# Altium PCB stencil.PcbDoc (part 1 of 2)
Units mil, origin at the board's own origin, x right, y up, seen from the top; angles counter-clockwise.
Board outline 6000 x 6360 mil, 2 copper layers (Top Layer, Bottom Layer); 167 components, 0 nets, 527 pads, 94 vias.
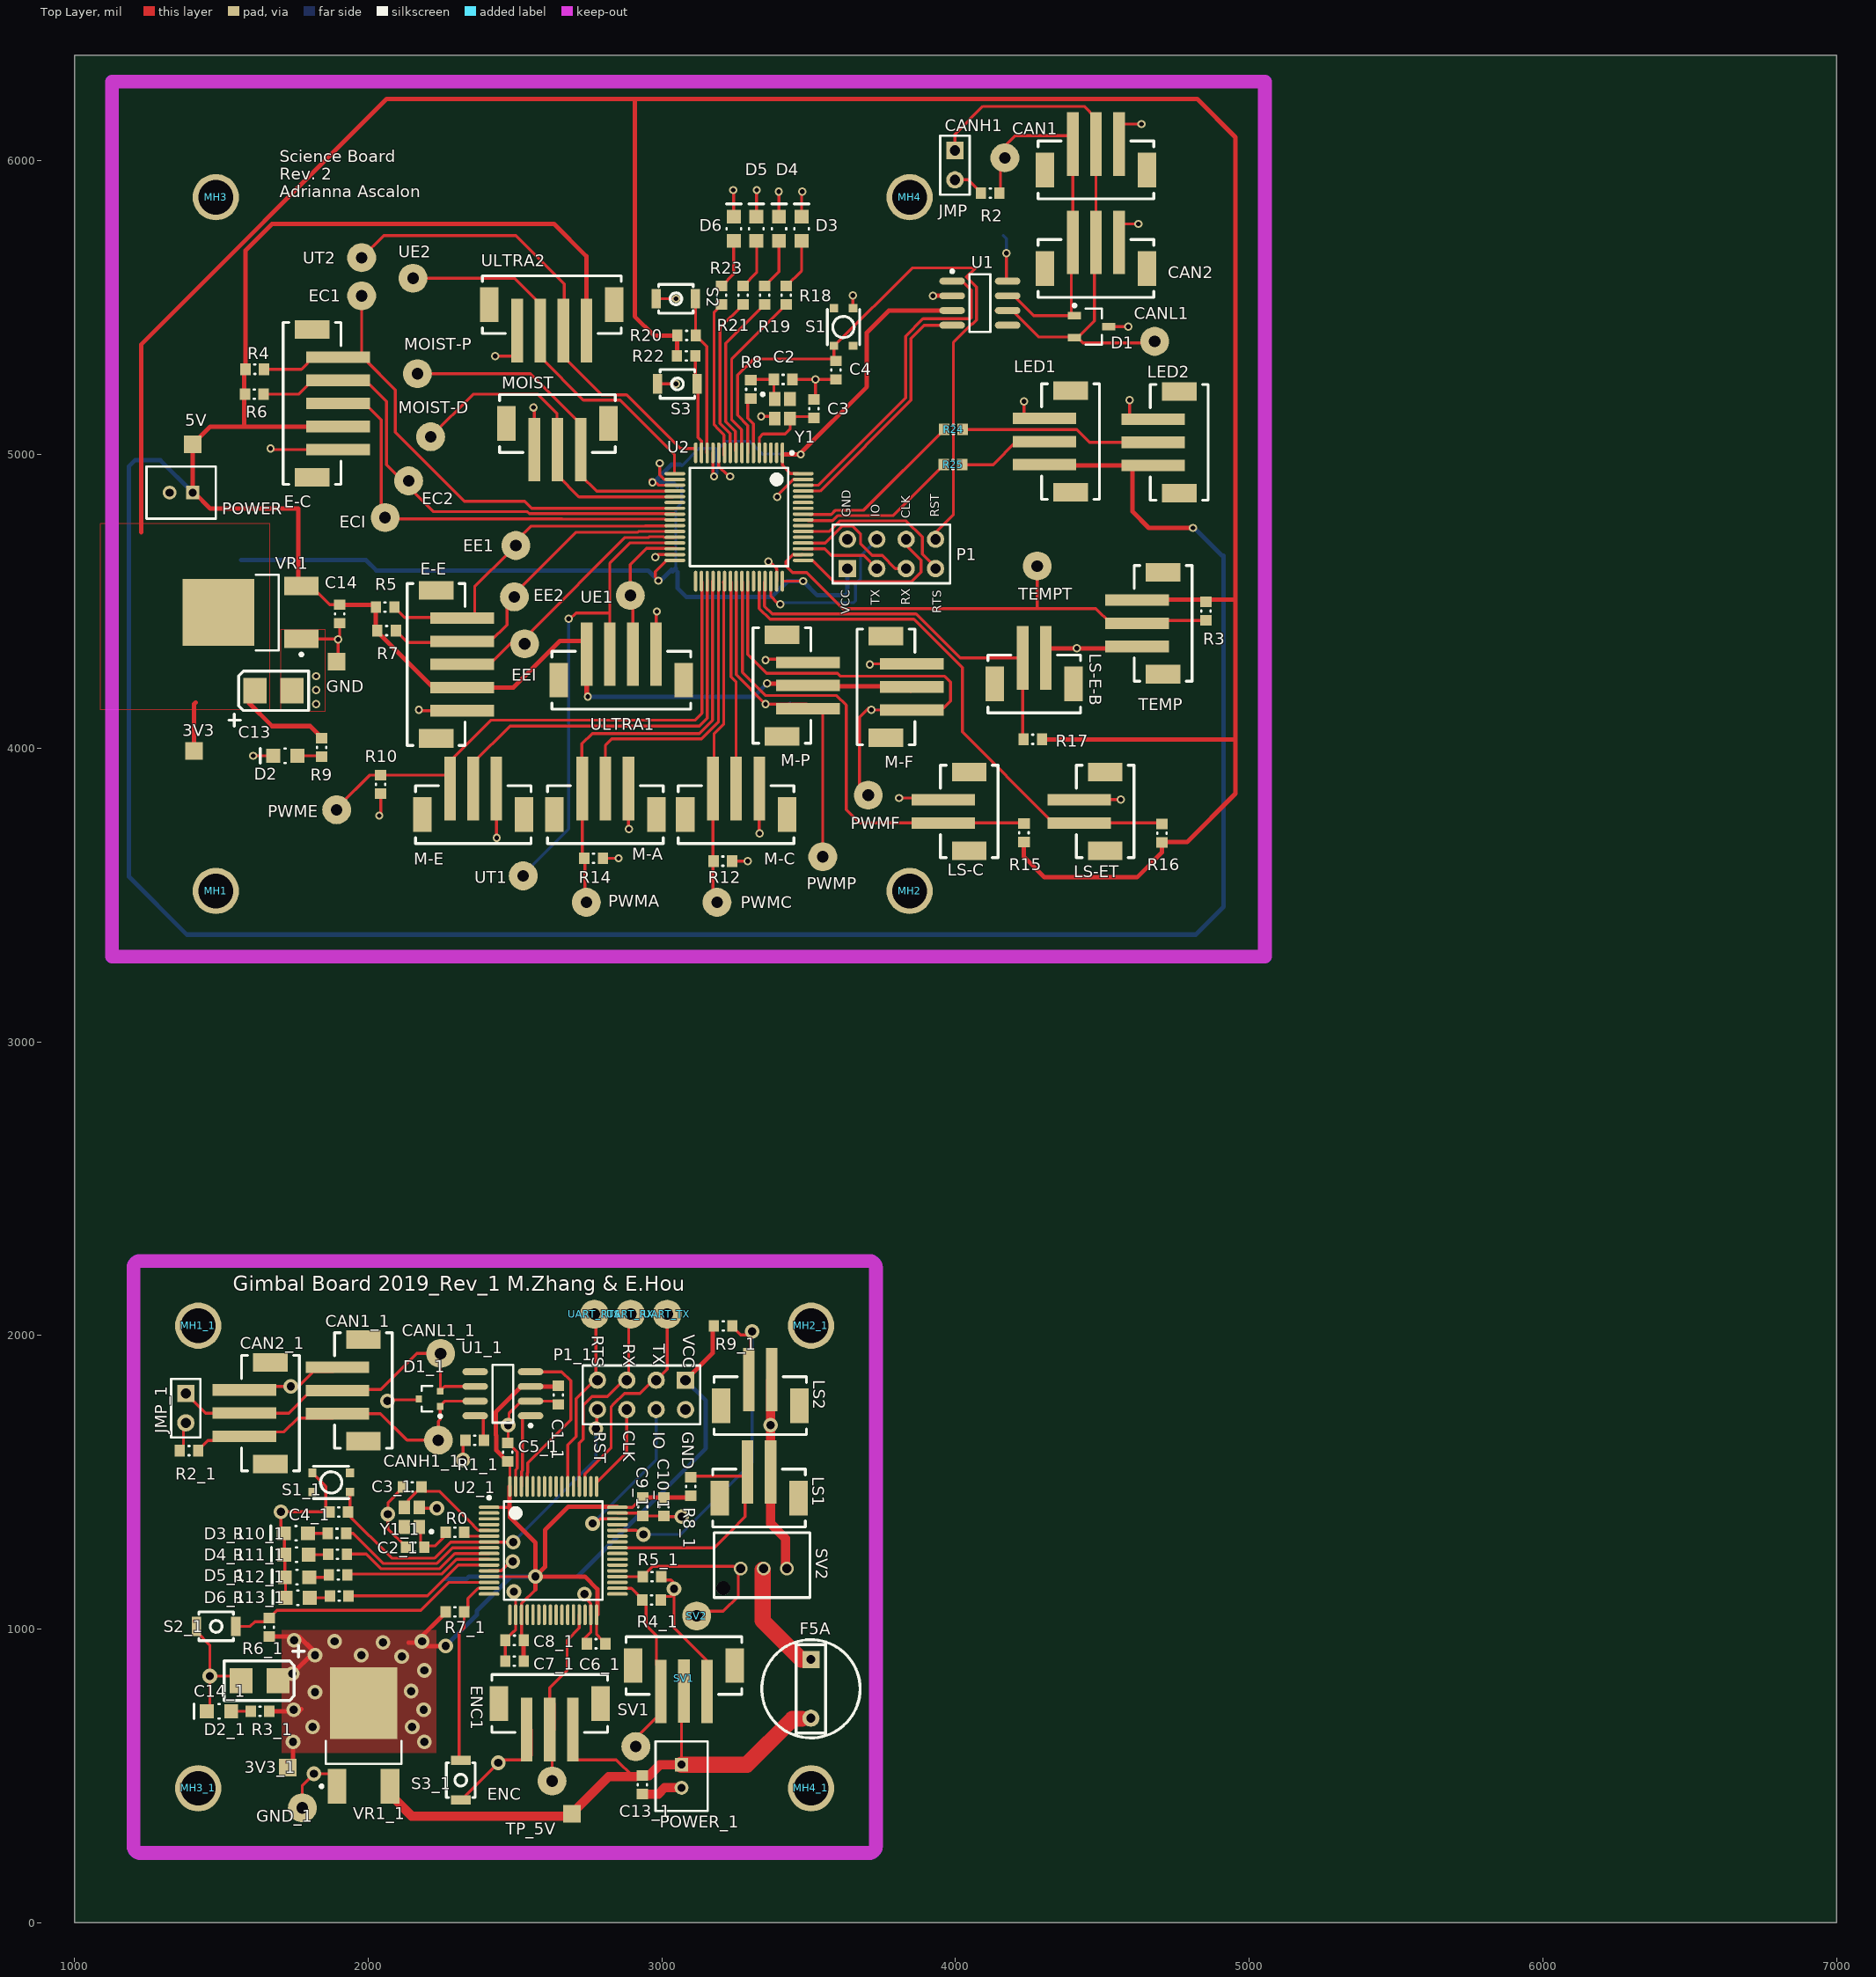
[diagram p0: Top Layer view]
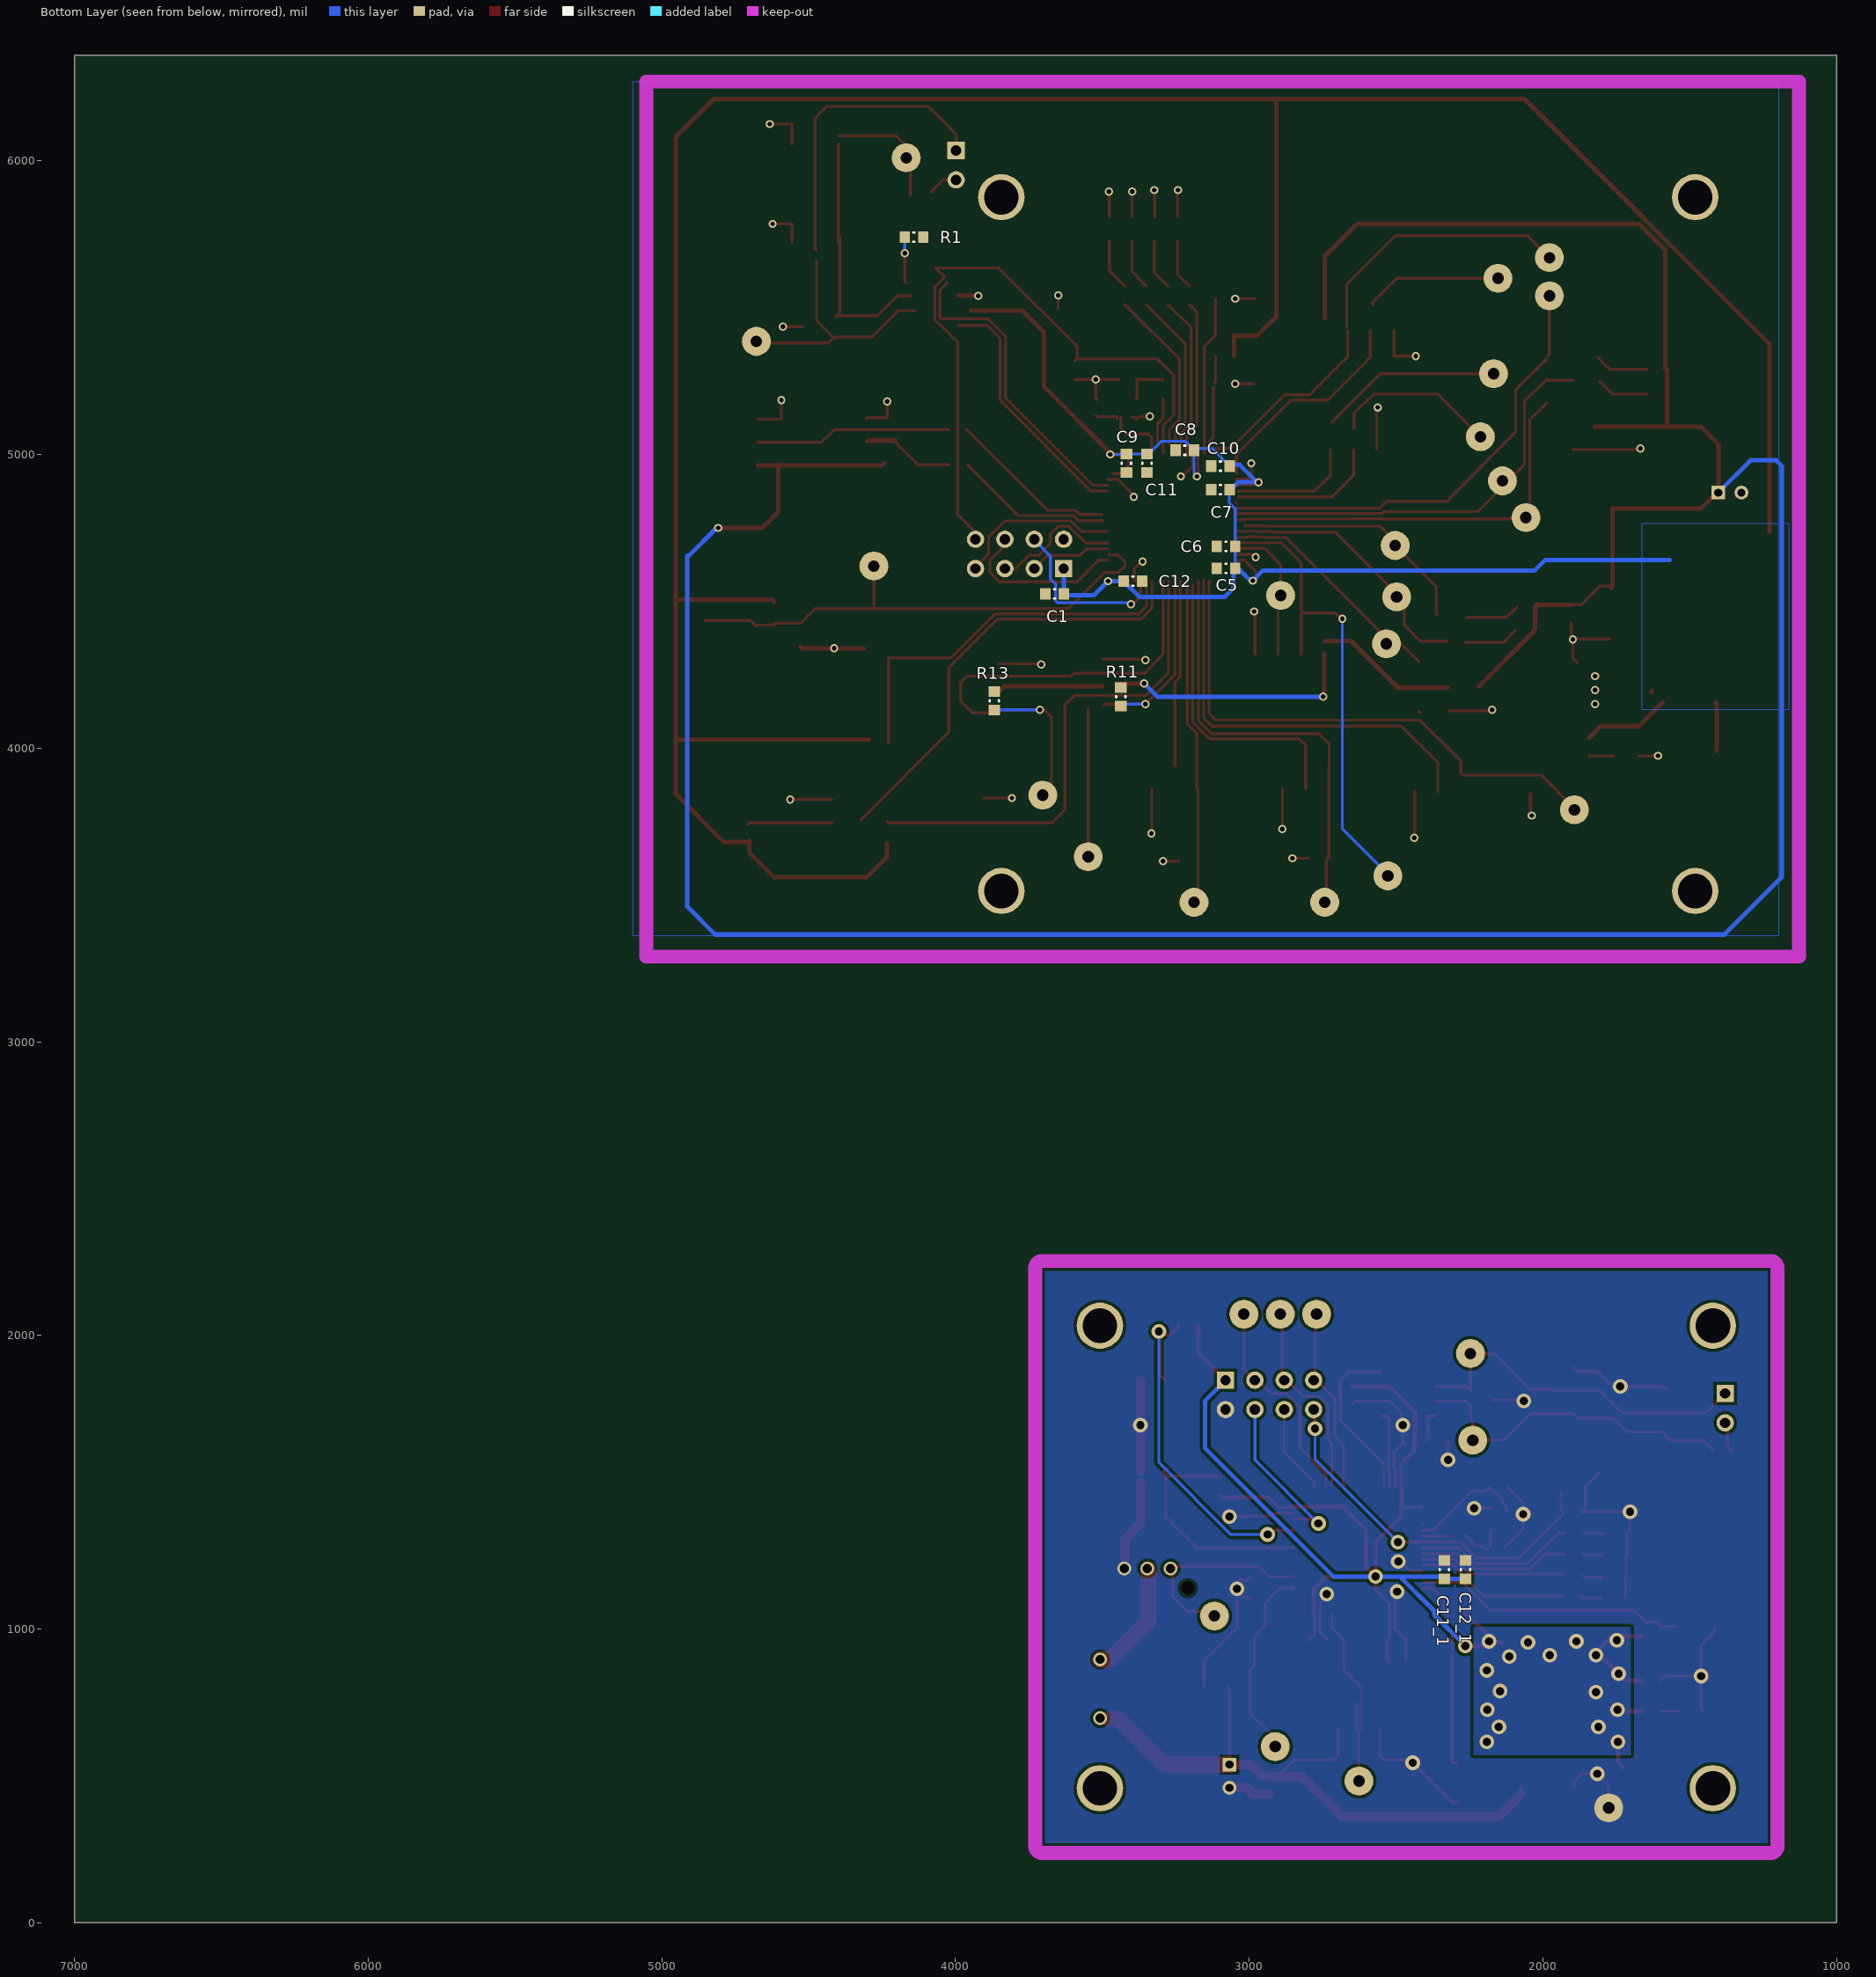
[diagram p1: Bottom Layer view, seen from below]

## Layer stack, top to bottom
Top Solder: solder mask 0.4, Solder Resist, Dk 3.5
Top Layer: signal copper 1.4
Dielectric 1: dielectric 12.6, FR-4, Dk 4.8
Bottom Layer: signal copper 1.4
Bottom Solder: solder mask 0.4, Solder Resist, Dk 3.5

## Board outline
1000,0 7000,0 7000,6360 1000,6360

## Design rules (kind name [scope] priority, off if disabled: settings)
Clearance [All] p1: gap=10 ignorepadtopadclearanceinfootprint=FALSE except(0: Arc-Hole Track-Hole SMDPad-Hole THPad-Hole Via-Hole Fill-Hole Poly-Hole Region-Hole Text-Hole)
PolygonConnect [All] p1: connectstyle=Relief reliefconductorwidth=10 reliefentries=4 polygonreliefangle="90 Angle" airgapwidth=10
RoutingVias [All] p1: holewidth=28 width=50 viastyle="Through Hole" minholewidth=28 minwidth=50 maxholewidth=28 maxwidth=50
SolderMaskExpansion [All] p1: expansion=4
Width [All] p1: maxlimit=10 minlimit=10 preferedwidth=10
30 further rules are at their usual default settings.

## Components (designator, comment, footprint, x,y, rotation, side; value= is the part's Value field where it differs from the comment)
3V3 "TESTPOINT_SMD" TESTPOINT 1407.99,3990 r90 top
3V3_1 "*" TESTPOINT 1726.85,529.25 r90 top (schematic designator 3V3)
5V "TESTPOINT_SMD" TESTPOINT 1402.99,5035 r0 top (schematic designator 2)
C1 "CAP_0.1uF_16V_0603" CAPC0603(1608)55_N 3662.99,4525 r180 bottom value=0.1uF
C1_1 "CAP_0.1uF_16V_0603" CAPC0603(1608)55_N 2648,1796.97 r90 top value=0.1uF (schematic designator C1)
C2 "CAP_15pF_0603" CAPC0603(1608)55_N 3412.99,5255.42 r180 top locked value=15pF
C2_1 "CAP_15pF_0603" CAPC0603(1608)55_N 2159.92,1278.92 r0 top value=15pF (schematic designator C2)
C3 "CAP_15pF_0603" CAPC0603(1608)55_N 3517.72,5155.38 r270 top locked value=15pF
C3_1 "CAP_15pF_0603" CAPC0603(1608)55_N 2150.08,1483.98 r0 top value=15pF (schematic designator C3)
C4 "CAP_0.1uF_16V_0603" CAPC0603(1608)55_N 3592.99,5286.91 r90 top locked value=0.1uF
C4_1 "CAP_0.1uF_16V_0603" CAPC0603(1608)55_N 1900.08,1399.16 r0 top value=0.1uF (schematic designator C4)
C5 "CAP_0.1uF_16V_0603" CAPC0603(1608)55_N 3079.29,4611.91 r0 bottom value=0.1uF
C5_1 "CAP_0.1uF_16V_0603" CAPC0603(1608)55_N 2474.88,1602.25 r90 top value=0.1uF (schematic designator C5)
C6 "CAP_0.1uF_16V_0603" CAPC0603(1608)55_N 3079.29,4686.91 r0 bottom value=0.1uF
C6_1 "CAP_0.1uF_16V_0603" CAPC0603(1608)55_N 2776.06,950.51 r180 top value=0.1uF (schematic designator C6)
C7 "CAP_0.1uF_16V_0603" CAPC0603(1608)55_N 3097.99,4880.14 r0 bottom value=0.1uF
C7_1 "CAP_0.1uF_16V_0603" CAPC0603(1608)55_N 2498.5,891.12 r180 top value=0.1uF (schematic designator C7)
C8 "CAP_4.7uF_0603" CAPC0603(1608)55_N 3219.31,5014.32 r180 bottom value=4.7uF
C8_1 "CAP_4.7uF_0603" CAPC0603(1608)55_N 2498.5,962.16 r0 top value=4.7uF (schematic designator C8)
C9 "CAP_0.1uF_16V_0603" CAPC0603(1608)55_N 3417.99,4970 r270 bottom value=0.1uF
C9_1 "CAP_0.1uF_16V_0603" CAPC0603(1608)55_N 2935.71,1417.28 r270 top value=0.1uF (schematic designator C9)
C10 "CAP_4.7uF_0603" CAPC0603(1608)55_N 3097.99,4960.14 r180 bottom value=4.7uF
C10_1 "CAP_4.7uF_0603" CAPC0603(1608)55_N 3006.74,1417.05 r90 top value=4.7uF (schematic designator C10)
C11 "CAP_10nF_0603" CAPC0603(1608)55_N 3347.99,4970 r90 bottom value=10nF
C11_1 "CAP_10nF_0603" CAPC0603(1608)55_N 2335.12,1202.48 r270 bottom value=10nF (schematic designator C11)
C12 "CAP_1uF_16V_0603" CAPC0603(1608)55_N 3396.5,4568.41 r0 bottom value=1uF
C12_1 "CAP_1uF_16V_0603" CAPC0603(1608)55_N 2264.08,1202.48 r270 bottom value=1uF (schematic designator C12)
C13 "CAP_10uF_1411_POL" AVX-CAPC3528_V 1677.99,4195 r0 top value=10uF
C13_1 "CAP_0.33uF_16V_0603" CAPC0603(1608)55_N 2933.54,470.2 r90 top value=0.33uF (schematic designator C13)
C14 "CAP_0.33uF_16V_0603" CAPC0603(1608)55_N 1902.99,4456.91 r90 top value=0.33uF
C14_1 "CAP_10uF_1411_POL" AVX-CAPC3528_V 1630.39,824.53 r180 top value=10uF (schematic designator C14)
CAN1 "PH TOP SMD" JST-B3B-SM4-TB#1 4477.99,5870 r0 top
CAN1_1 "CON_3M" JST-B3B-SM4-TB#1 2082.54,1812.72 r90 top (schematic designator CAN1)
CAN2 "PH TOP SMD" JST-B3B-SM4-TB#1 4477.99,5535 r0 top locked
CAN2_1 "CON_3M" JST-B3B-SM4-TB#1 1766.22,1735.71 r90 top (schematic designator CAN2)
CANH1 "TESTPOINT_LOOP" TESTPOINT_LOOP#1 4167.99,6010 r0 top
CANH1_1 "TESTPOINT_LOOP" TESTPOINT_LOOP#1 2239.1,1643.43 r270 top (schematic designator CANH1)
CANL1 "TESTPOINT_LOOP" TESTPOINT_LOOP#1 4677.99,5385 r90 top
CANL1_1 "TESTPOINT_LOOP" TESTPOINT_LOOP#1 2247.01,1938.7 r270 top (schematic designator CANL1)
D1 "TVS_DIODE_CAN" TVS_DIODE_CAN 4462.99,5435 r0 top
D1_1 "TVS_DIODE_CAN" NXP-SOT323-3 2209.13,1784.43 r180 top (schematic designator D1)
D2 "DIO_LED_R" LED_0805_LINE 1717.99,3973.85 r180 top
D2_1 "DIO_LED_R" LED_0805_LINE 1492.43,720.2 r180 top (schematic designator D2)
D3 "DIO_LED_Y" LED_0805_LINE 3476,5768.32 r90 top
D3_1 "DIO_LED_Y" LED_0805_LINE 1754.24,1326.5 r180 top (schematic designator D3)
D4 "DIO_LED_G" LED_0805_LINE 3399.01,5768.32 r90 top
D4_1 "DIO_LED_G" LED_0805_LINE 1756.18,1253.66 r180 top (schematic designator D4)
D5 "DIO_LED_G" LED_0805_LINE 3322.03,5768.32 r90 top
D5_1 "DIO_LED_G" LED_0805_LINE 1758.18,1176.89 r180 top (schematic designator D5)
D6 "DIO_LED_G" LED_0805_LINE 3245.04,5768.32 r90 top
D6_1 "DIO_LED_G" LED_0805_LINE 1760.31,1106.88 r180 top (schematic designator D6)
E-C "PH TOP SMD" JST-B5B-SM4-TB 1710.98,5173.74 r270 top
E-E "PH TOP SMD" JST-B5B-SM4-TB 2132.99,4285 r270 top
EC1 "TESTPOINT_LOOP" TESTPOINT_LOOP#1 1977.99,5540 r180 top
EC2 "TESTPOINT_LOOP" TESTPOINT_LOOP#1 2137.99,4910 r0 top
ECI "TESTPOINT_LOOP" TESTPOINT_LOOP#1 2057.99,4785 r0 top
EE1 "TESTPOINT_LOOP" TESTPOINT_LOOP#1 2502.99,4690 r90 top
EE2 "TESTPOINT_LOOP" TESTPOINT_LOOP#1 2497.99,4515 r90 top
EEI "TESTPOINT_LOOP" TESTPOINT_LOOP#1 2532.99,4355 r90 top
ENC "TESTPOINT_LOOP" TESTPOINT_LOOP#1 2626.46,483.18 r0 top
ENC1 "CON_3M" JST-B3B-SM4-TB#1 2618.58,845.68 r180 top
F5A "FUSE" FUSE 3507.67,796.97 r270 top
GND "TESTPOINT_SMD" TESTPOINT 1892.99,4295 r90 top
GND_1 "TESTPOINT_LOOP" TESTPOINT_LOOP#1 1776.06,391.46 r0 top (schematic designator GND)
JMP "Header 2" HDR1X2 3997.99,6035 r270 top (schematic designator 1)
JMP_1 "Header 2" HDR1X2 1379.51,1802.56 r270 top (schematic designator 1)
LED1 "CON_3M" JST-B3B-SM4-TB#1 4490,5043.74 r90 top
LED2 "CON_3M" JST-B3B-SM4-TB#1 4860,5041.26 r90 top
LS1 "CON_2M" JST-B2B-SM4-TB 3331.18,1348.31 r0 top
LS2 "CON_2M" JST-B2B-SM4-TB 3335.12,1662.52 r0 top
LS-C "PH TOP SMD" JST-B2B-SM4-TB 4145,3784.37 r90 top locked
LS-E-B "PH TOP SMD" JST-B2B-SM4-TB 4267.99,4120 r0 top
LS-ET "PH TOP SMD" JST-B2B-SM4-TB 4607.99,3784.37 r90 top locked
M-A "PH TOP SMD" JST-B3B-SM4-TB#1 2807.99,3675 r0 top
M-C "PH TOP SMD" JST-B3B-SM4-TB#1 3252.99,3675 r0 top
M-E "PH TOP SMD" JST-B3B-SM4-TB#1 2357.99,3675 r0 top
M-F "PH TOP SMD" JST-B3B-SM4-TB#1 3664.56,4208.23 r270 top locked
M-P "PH TOP SMD" JST-B3B-SM4-TB#1 3310.67,4213.23 r270 top
MH1 "MOUNTING_HOLES" MOUNTING_HOLE#1 1312.99,3434.96 r0 top
MH1_1 "MOUNTING_HOLES" MOUNTING_HOLE#2 1352.83,2066.65 r0 top (schematic designator MH1)
MH2 "MOUNTING_HOLES" MOUNTING_HOLE#3 5891.15,3316.85 r0 top
MH2_1 "MOUNTING_HOLES" MOUNTING_HOLE#4 3823.31,2230.04 r0 top (schematic designator MH2)
MH3 "MOUNTING_HOLES" MOUNTING_HOLE#5 5261.22,3553.07 r0 top
MH3_1 "MOUNTING_HOLES" MOUNTING_HOLE#6 1350.87,411.14 r0 top (schematic designator MH3)
MH4 "MOUNTING_HOLES" MOUNTING_HOLE#7 5472.8,3340.95 r0 top
MH4_1 "MOUNTING_HOLES" MOUNTING_HOLE#8 4150.08,2230.04 r0 top (schematic designator MH4)
MOIST "PH TOP SMD" JST-B3B-SM4-TB#1 2644.76,5203.43 r180 top
MOIST-D "TESTPOINT_LOOP" TESTPOINT_LOOP#1 2212.99,5060 r90 top
MOIST-P "TESTPOINT_LOOP" TESTPOINT_LOOP#1 2167.99,5275 r90 top
P1 "HEADER 4X2" HEADER_2X4 3631.93,4611.19 r0 top locked
P1_1 "HEADER 4X2" HEADER_2X4 3080.79,1847.76 r180 top (schematic designator P1)
POWER "PH TOP TH" JST-B2B-PHSK 1363.62,4870 r180 top
POWER_1 "CON_2M" JST-B2B-PHSK 3067.18,499.37 r270 top (schematic designator POWER)
PWMA "TESTPOINT_LOOP" TESTPOINT_LOOP#1 2742.99,3475 r90 top
PWMC "TESTPOINT_LOOP" TESTPOINT_LOOP#1 3187.99,3475 r90 top
PWME "TESTPOINT_LOOP" TESTPOINT_LOOP#1 1892.99,3790 r90 top
PWMF "TESTPOINT_LOOP" TESTPOINT_LOOP#1 3702.99,3840 r90 top
PWMP "TESTPOINT_LOOP" TESTPOINT_LOOP#1 3547.99,3630 r90 top
R0 "RES_0R_0603" RESC0603(1608)_N 2295.58,1330.43 r180 top value=0R
R1 "RES_0R_0603" RESC0603(1608)_N 4141.5,5740 r180 bottom value=0R
R1_1 "RES_0R_0603" RESC0603(1608)_N 2362.68,1642.75 r180 top value=0R (schematic designator R1)
R2 "RES_120R_0603" RESC0603(1608)_N 4117.99,5890 r180 top value=120R
R2_1 "RES_120R_0603" RESC0603(1608)_N 1390.24,1608.11 r180 top value=120R (schematic designator R2)
R3 "RES_4K7_0603" RESC0603(1608)_N 4852.99,4466.5 r90 top value=4K7
R3_1 "RES_100R_0603" RESC0603(1608)_N 1632.36,720.2 r0 top value=100R (schematic designator R3)
R4 "RES_10K_0603" RESC0603(1608)_N 1614.49,5290 r180 top value=10K
R4_1 "RES_10K_0603" RESC0603(1608)_N 2965.24,1099.75 r180 top value=10K (schematic designator R4)
R5 "RES_10K_0603" RESC0603(1608)_N 2057.99,4480 r180 top value=10K
R5_1 "RES_10K_0603" RESC0603(1608)_N 2967.01,1178.69 r180 top value=10K (schematic designator R5)
R6 "RES_10K_0603" RESC0603(1608)_N 1612.99,5205 r180 top value=10K
R6_1 "RES_10K_0603" RESC0603(1608)_N 1663.86,1006.83 r270 top value=10K (schematic designator R6)
R7 "RES_10K_0603" RESC0603(1608)_N 2062.99,4400 r180 top value=10K
R7_1 "RES_10K_0603" RESC0603(1608)_N 2295.61,1058.78 r0 top value=10K (schematic designator R7)
R8 "RES_0R_0603" RESC0603(1608)_N 3302.99,5221.91 r90 top value=0R
R8_1 "RES_10K_0603" RESC0603(1608)_N 3098.9,1486.29 r270 top value=10K (schematic designator R8)
R9 "RES_100R_0603" RESC0603(1608)_N 1842.05,4002.39 r90 top value=100R
R9_1 "RES_10K_0603" RESC0603(1608)_N 3208.71,2032.44 r180 top value=10K (schematic designator R9)
R10 "RES_10K_0603" RESC0603(1608)_N 2042.99,3876.5 r90 top value=10K
R10_1 "RES_100R_0603" RESC0603(1608)_N 1894.17,1326.5 r0 top value=100R (schematic designator R10)
R11 "RES_10K_0603" RESC0603(1608)_N 3437.21,4175 r270 bottom value=10K
R11_1 "RES_100R_0603" RESC0603(1608)_N 1896.14,1255.46 r0 top value=100R (schematic designator R11)
R12 "RES_10K_0603" RESC0603(1608)_N 3207.99,3615 r180 top value=10K
R12_1 "RES_100R_0603" RESC0603(1608)_N 1898.11,1184.43 r0 top value=100R (schematic designator R12)
R13 "RES_10K_0603" RESC0603(1608)_N 3867.99,4161.5 r270 bottom value=10K
R13_1 "RES_100R_0603" RESC0603(1608)_N 1902.05,1113.4 r0 top value=100R (schematic designator R13)
R14 "RES_10K_0603" RESC0603(1608)_N 2767.99,3625 r180 top value=10K
R15 "RES_10K_0603" RESC0603(1608)_N 4232.99,3711.5 r270 top value=10K
R16 "RES_10K_0603" RESC0603(1608)_N 4702.99,3710 r270 top value=10K
R17 "RES_10K_0603" RESC0603(1608)_N 4262.99,4030 r0 top value=10K
R18 "RES_100R_0603" RESC0603(1608)_N 3423.47,5542.03 r90 top value=100R
R19 "RES_100R_0603" RESC0603(1608)_N 3350.13,5542.03 r90 top value=100R
R20 "RES_10K_0603" RESC0603(1608)_N 3084.49,5405 r180 top value=10K
R21 "RES_100R_0603" RESC0603(1608)_N 3276.8,5542.03 r90 top value=100R
R22 "RES_10K_0603" RESC0603(1608)_N 3082.99,5335 r0 top value=10K
R23 "RES_100R_0603" RESC0603(1608)_N 3203.47,5542.03 r90 top value=100R
R24 "RES_0R_0603" RESC0603(1608)_N 3992.99,5085 r180 top value=0R
R25 "RES_0R_0603" RESC0603(1608)_N 3991.5,4965 r180 top value=0R
S1 "SW_PWR" PTS830GM140 3618.35,5433.77 r270 top
S1_1 "SW_PWR" PTS830GM140 1874.49,1499.8 r0 top (schematic designator S1)
S2 "SW_TACTILE" B3U-1100P 3047.99,5530 r180 top
S2_1 "SW_TACTILE" B3U-1100P 1482.76,1009.57 r180 top (schematic designator S2)
S3 "SW_TACTILE" B3U-1100P 3052.99,5240 r180 top
S3_1 "SW_TACTILE" B3U-1100P 2315.43,485.94 r270 top (schematic designator S3)
SV1 "CON_3M" JST-B3B-SM4-TB#2 3075.28,974.72 r180 top
SV1 "TESTPOINT_LOOP" TESTPOINT_LOOP#1 2911.44,600.41 r90 top
SV2 "TESTPOINT_LOOP" TESTPOINT_LOOP#2 3281.97,535.53 r90 top
SV2 "CON_3M" "JST B03B-PASK" 3307.56,1206.42 r180 top
TEMP "PH TOP SMD" JST-B3B-SM4-TB#1 4805,4425 r90 top
TEMPT "TESTPOINT_LOOP" TESTPOINT_LOOP#1 4277.99,4620 r90 top
TP_5V "*" TESTPOINT 2693.39,371.77 r90 top (schematic designator TESTPOINT_5V)
U1 "IC TXRX CAN" LT-S8_N 4082.99,5515 r0 top
U1_1 "IC TXRX CAN" LT-S8_N 2458.86,1801.57 r180 top (schematic designator U1)
U2 "STM32F091RC" STM_LQFP64_N 3262.99,4786.91 r270 top locked
U2_1 "STM32F091RC" STM_LQFP64_N 2630.42,1267.44 r0 top (schematic designator U2)
UART_RTS "TESTPOINT_LOOP" TESTPOINT_LOOP#3 2770.55,2078.46 r90 top
UART_RX "TESTPOINT_LOOP" TESTPOINT_LOOP#4 2894.17,2080.43 r90 top
UART_TX "TESTPOINT_LOOP" TESTPOINT_LOOP#1 3018.19,2072.56 r90 top
UE1 "TESTPOINT_LOOP" TESTPOINT_LOOP#1 2892.99,4520 r90 top
UE2 "TESTPOINT_LOOP" TESTPOINT_LOOP#1 2152.99,5600 r0 top
ULTRA1 "PH TOP SMD" JST-B4B-SM4-TB 2862.36,4132.99 r0 top
ULTRA2 "PH TOP SMD" JST-B4B-SM4-TB 2625.59,5608.43 r180 top
UT1 "TESTPOINT_LOOP" TESTPOINT_LOOP#1 2527.99,3565 r90 top
UT2 "TESTPOINT_LOOP" TESTPOINT_LOOP#1 1977.99,5670 r0 top
VR1 "5V0_3V3_LDO" VOLTAGE_REGULATOR 1662.99,4461.91 r90 top
VR1_1 "5V0_3V3_LDO" VOLTAGE_REGULATOR 1984.72,574.92 r0 top (schematic designator VR1)
Y1 "CRYSTAL_32MHZ" AVX-CX2520DB32000D0GEJZ1-4_V 3410.52,5155.38 r0 top locked
Y1_1 "CRYSTAL_32MHZ" AVX-CX2520DB32000D0GEJZ1-4_V 2148.76,1381.45 r180 top (schematic designator Y1)

## Footprints (in the part's own frame and the unit in brackets; to place one, negate y for a bottom-side part, rotate by r counter-clockwise, add the part's x,y. Pads: shape width x height; smd on the part's side, far side on the other; paste and mask are expansions set on the pad)
AVX-CAPC3528_V [mm] "SMT Capacitor, 2 Leads, Body 3.5x2.8mm"
  rect 2x2.2 smd: 1(-1.6,0) 2(1.6,0)
  silkscreen extent -3.87,-3.05 3.05,1.7, body extent -1.79,-1.54 1.8,1.54, height 1.9
AVX-CX2520DB32000D0GEJZ1-4_V [mm] "Hand Drawn, 4-Leads,Body 2.5x2mm"
  rect 1x1.2 smd: 1(-0.65,0.85) 2(-0.65,-0.85) 3(0.65,-0.85) 4(0.65,0.85)
  silkscreen extent -1.82,1.13 -1.58,1.38, body extent -1,-1.25 1,1.25, height 0.55
B3U-1100P [mm] "TACTILE SWITCH GREY"
  rect 0.8x1.7 smd: 1(-1.7,0) 2(1.7,0)
  silkscreen extent -1.5,-1.25 1.5,1.25
CAPC0603(1608)55_N [mm] "Chip Capacitor, Body 1.6x0.8mm, Height 0.55mm, IPC Medium Density"
  rect 0.9x1 smd: 1(-0.8,0) 2(0.8,0)
  silkscreen extent -0.05,-0.4 0.05,0.4, body extent -0.87,-0.48 0.88,0.47, height 0.55
FUSE [mm] "FUSE HOLDER RADIAL 250V 6.3A PCB"
  rect 1.48x1.48 / inner round 1.524 / far side round 1.2 hole 0.78: 1(-2.54,0)
  round 1.48 / inner round 1.524 / far side round 1.2 hole 0.78: 2(2.54,0)
  silkscreen extent -4.25,-4.25 4.25,4.25
HDR1X2 [mm] "Connector; Header; 2 Position"
  rect 1.5x1.5 hole 0.9: 1(0,0)
  round 1.5 hole 0.9: 2(2.54,0)
  silkscreen extent -1.27,-1.27 3.81,1.27
HEADER_2X4 [mm]
  rect 1.5x1.5 hole 0.9: 1(0,0)
  round 1.5 hole 0.9: 2(2.54,0) 3(5.08,0) 4(7.62,0) 5(0,2.54) 6(2.54,2.54) 7(5.08,2.54) 8(7.62,2.54)
  silkscreen extent -1.27,-1.27 8.89,3.81
"JST B03B-PASK" [mm] "PA TOP 3A 3POS 2mm Pitch"
  round 1.2 / inner round 1.524 / far side round 1.2 hole 0.8: 1(-3,0) 2(-1,0) 3(1,0)
  round 1.2 hole 1.2: 4(2.5,1.7)
  silkscreen extent -5,-3.1 3.3,2.5
JST-B2B-PHSK [mm]
  rect 1.162x1.162 / inner rect 1.524x1.524 / far side rect 1.162x1.162 hole 0.7: 1(-1,0)
  round 1.2 / inner round 1.524 / far side round 1.2 hole 0.7: 2(1,0)
  silkscreen extent -3,-2.25 3,2.25
JST-B2B-SM4-TB [mm]
  rect 1x5.5 smd: 1(-1,4.75) 2(1,4.75)
  rect 1.6x3 smd: 3(-3.4,2.5) 4(3.4,2.5)
  silkscreen extent -4,0 4,5
JST-B3B-SM4-TB#1 [mm]
  rect 1x5.5 smd: 1(-2,4.75) 2(0,4.75) 3(2,4.75)
  rect 1.6x3 smd: 4(-4.4,2.5) 5(4.4,2.5)
  silkscreen extent -5,0 5,5
JST-B3B-SM4-TB#2 [mm]
  rect 1x5.5 smd: 1(-2,4.75) 2(0,4.715) 3(2,4.75)
  rect 1.6x3 smd: 4(-4.4,2.5) 5(4.4,2.5)
  silkscreen extent -5,0 5,5
JST-B4B-SM4-TB [mm]
  rect 1x5.5 smd: 1(-3,4.75) 2(-1,4.75) 3(1,4.75) 4(3,4.75)
  rect 1.6x3 smd: 5(-5.4,2.5) 6(5.4,2.5)
  silkscreen extent -6,0 6,5
JST-B5B-SM4-TB [mm]
  rect 1x5.5 smd: 1(-4,4.75) 2(-2,4.75) 3(0,4.75) 4(2,4.75) 5(4,4.75)
  rect 1.6x3 smd: 6(-6.4,2.5) 7(6.4,2.5)
  silkscreen extent -7,0 7,5
LED_0805_LINE [mm] "SMD, 2-Leads, Body 2x1.25mm"
  rect 1.2x1.2 smd: 1(-1.05,0) 2(1.05,0)
  silkscreen extent -0.05,-0.63 2.16,0.64, body extent -1,-0.63 1,0.63, height 0.8
LT-S8_N [mm] "SOP, 8-Leads, Body 4.9x3.9mm, Pitch 1.27mm, IPC Medium Density"
  oval 2.2x0.6 smd: 1(-2.4,1.905) 2(-2.4,0.635) 3(-2.4,-0.635) 4(-2.4,-1.905) 5(2.4,-1.905) 6(2.4,-0.635) 7(2.4,0.635) 8(2.4,1.905)
  silkscreen extent -2.52,-2.5 0.9,2.88, body extent -2,-2.5 2,2.5, height 1.76
MOUNTING_HOLE#1 [mm]
  round 4 hole 3 unplated: 0(4.285,2)
MOUNTING_HOLE#2 [mm]
  round 4 hole 3 unplated: 0(1.75,-0.85)
MOUNTING_HOLE#3 [mm]
  round 4 hole 3 unplated: 0(-52,5)
MOUNTING_HOLE#4 [mm]
  round 4 hole 3 unplated: 0(-8,-5)
MOUNTING_HOLE#5 [mm]
  round 4 hole 3 unplated: 0(-96,59)
MOUNTING_HOLE#6 [mm]
  round 4 hole 3 unplated: 0(1.8,1.2)
MOUNTING_HOLE#7 [mm]
  round 4 hole 3 unplated: 0(-41.374,64.388)
MOUNTING_HOLE#8 [mm]
  round 4 hole 3 unplated: 0(-16.3,-45)
NXP-SOT323-3 [mm] "SOT23, 3-Leads, Body 2.2x1.35mm, Pitch 0.65mm"
  rect 0.55x0.6 smd paste-1: 1(-0.925,0.65) 2(-0.925,-0.65) 3(0.925,0)
  silkscreen extent -1.05,-1.1 0.67,1.62, body extent -1.15,-1.1 1.15,1.1, height 1.1
PTS830GM140 [mm] "PWR TACTILE SWITCH (RED)"
  rect 0.7x0.75 smd: 1(-1.625,0.825) 2(1.625,0.825) 3(-1.625,-0.825) 4(1.625,-0.825)
  silkscreen extent -1.53,-1.4 1.52,1.4
RESC0603(1608)_N [mm] "Chip Resistor, Body 1.6x0.8mm, IPC Medium Density"
  rect 0.9x1 smd: 1(-0.8,0) 2(0.8,0)
  silkscreen extent -0.05,-0.4 0.05,0.4, body extent -0.85,-0.47 0.85,0.47, height 0.6
STM_LQFP64_N [mm] "Thin QFP, 64-Leads, Body 10x10mm, Pitch 0.5mm, IPC Medium Density"
  oval 1.8x0.3 smd mask+0.05: 1(-5.55,3.75) 2(-5.55,3.25) 3(-5.55,2.75) 4(-5.55,2.25) 5(-5.55,1.75) 6(-5.55,1.25) 7(-5.55,0.75) 8(-5.55,0.25) 9(-5.55,-0.25) 10(-5.55,-0.75) 11(-5.55,-1.25) 12(-5.55,-1.75) 13(-5.55,-2.25) 14(-5.55,-2.75) 15(-5.55,-3.25) 16(-5.55,-3.75) 33(5.55,-3.75) 34(5.55,-3.25) 35(5.55,-2.75) 36(5.55,-2.25) 37(5.55,-1.75) 38(5.55,-1.25) 39(5.55,-0.75) 40(5.55,-0.25) 41(5.55,0.25) 42(5.55,0.75) 43(5.55,1.25) 44(5.55,1.75) 45(5.55,2.25) 46(5.55,2.75) 47(5.55,3.25) 48(5.55,3.75)
  oval 0.3x1.8 smd mask+0.05: 17(-3.75,-5.55) 18(-3.25,-5.55) 19(-2.75,-5.55) 20(-2.25,-5.55) 21(-1.75,-5.55) 22(-1.25,-5.55) 23(-0.75,-5.55) 24(-0.25,-5.55) 25(0.25,-5.55) 26(0.75,-5.55) 27(1.25,-5.55) 28(1.75,-5.55) 29(2.25,-5.55) 30(2.75,-5.55) 31(3.25,-5.55) 32(3.75,-5.55) 49(3.75,5.55) 50(3.25,5.55) 51(2.75,5.55) 52(2.25,5.55) 53(1.75,5.55) 54(1.25,5.55) 55(0.75,5.55) 56(0.25,5.55) 57(-0.25,5.55) 58(-0.75,5.55) 59(-1.25,5.55) 60(-1.75,5.55) 61(-2.25,5.55) 62(-2.75,5.55) 63(-3.25,5.55) 64(-3.75,5.55)
  silkscreen extent -5.67,-4.25 4.25,4.7, body extent -5,-5 5,5, height 1.6
TESTPOINT [mil]
  rect 60x60 smd: 1(0,0)
TESTPOINT_LOOP#1 [mm]
  round 2.5 hole 1: 1(0,0)
TESTPOINT_LOOP#2 [mm]
  round 2.5 hole 1: 1(12.94,4.15)
TESTPOINT_LOOP#3 [mm]
  round 2.5 hole 1: 1(-0.15,0)
TESTPOINT_LOOP#4 [mm]
  round 2.5 hole 1: 1(-0.2,0)
TVS_DIODE_CAN [mm] "SOT23, 3-Leads, Body 2.95x2.80mm, Pitch 0.95mm, IPC Low Density"
  rect 1.15x0.65 smd: 1(-1.475,0.95) 2(-1.475,-0.95) 3(1.475,0)
  silkscreen extent -1.6,-1.55 0.9,1.95, body extent -1.5,-1.55 1.5,1.55, height 1.25
VOLTAGE_REGULATOR [mm] "DPAK, 3-Leads, Body 6.095x6.54mm, Pitch 4.57mm"
  rect 1.6x3 smd: 1(-2.285,-2.79) 3(2.285,-2.79)
  rect 5.8x6.2 smd: 2(0,4.39)
  silkscreen extent -3.76,-2.92 3.27,1.14, body extent -3.27,-0.84 3.27,5.25, height 2.38

## Part data
3V3_1 TP_5V: "TESTPOINT_SMD"
C1 C1_1 C4 C4_1 C5 C5_1 C6 C6_1 C7 C7_1 C9 C9_1: "CAP CER 0.1UF 16V X7R 0603", Digikey Part Number=311-1088-1-ND, Manufacturer=Yageo, MPN=CC0603KRX7R7BB104, Package="0603 (1608 Metric)", Temperature Coefficient=X7R, Voltage Rating=16V, Dimensions="0.063\" L x 0.031\" W (1.60mm x 0.80mm)"
C2 C2_1 C3 C3_1: "CAP CER 15PF 250V NPO 0603", Digikey Part Number=311-3282-1-ND, Manufacturer=Yageo, MPN=AC0603JRNPOYBN150, Package="0603 (1608 Metric)", Temperature Coefficient=NP0, Voltage Rating=250v, Dimensions="0.063\" L x 0.031\" W (1.60mm x 0.80mm)"
C8 C8_1 C10 C10_1: "CAP CER 4.7UF 6.3V X5R 0603", Digikey Part Number=311-1521-1-ND, Manufacturer=Yageo, MPN=CC0603KRX5R5BB475, Package="0603 (1608 Metric)", Temperature Coefficient=X5R, Voltage Rating=6.3V, Dimensions="0.063\" L x 0.031\" W (1.60mm x 0.80mm)"
C11 C11_1: "CAP CER 10000PF 16V X7R 0603", Digikey Part Number=311-3369-1-ND, Manufacturer=Yageo, MPN=CC0603KRX7R7BB103, Package="0603 (1608 Metric)", Temperature Coefficient=X7R, Voltage Rating=16V, Dimensions="0.063\" L x 0.031\" W (1.60mm x 0.80mm)"
C12 C12_1: "CAP CER 1UF 16V Y5V 0603", Digikey Part Number=311-1372-1-ND, Manufacturer=Yageo, MPN=CC0603ZRY5V7BB105, Package="0603 (1608 Metric)", Temperature Coefficient=Y5V, Voltage Rating=16V, Dimensions="0.063\" L x 0.031\" W (1.60mm x 0.80mm)"
C13 C14_1: "CAP TANT 10UF 20% 10V 1411", Digikey Part Number=478-12047-1-ND, Manufacturer="AVX Corporation", MPN=F971A106MBAHT3, Package="1411 (3528 Metric)", Voltage Rating=10V, Dimensions="0.063\" L x 0.031\" W (1.60mm x 0.80mm)"
C13_1 C14: "CAP CER 0.33UF 16V X7R 0603", Digikey Part Number=490-6050-1-ND, Manufacturer="Murata Electronics North America", MPN=GCM188R71C334KA37D, Package="0603 (1608 Metric)", Temperature Coefficient=X7R, Voltage Rating=16V, Dimensions="0.063\" L x 0.031\" W (1.60mm x 0.80mm)"
CAN1 CAN2 M-A M-C M-E M-F M-P MOIST TEMP: library part CON_3M_PH_TOP_SMT, "CONN HEADER PH TOP 3POS 2MM SMD", Manufacturer=JST, Part Number=B3B-PH-SM4-TB, ComponentLink1Description=Datasheet, ComponentLink1URL=http://www.jst-mfg.com/product/pdf/eng/ePH.pdf
D1 D1_1: "TVS DIODE 24V 41V SOT323-3", Digikey Part Number=1727-3891-1-ND, Manufacturer="Nexperia USA Inc.", MPN=PESD2CAN,215, Package="SC-70, SOT-323", ComponentLink1Description=Datasheet, ComponentLink1URL=https://assets.nexperia.com/documents/data-sheet/PESD1CAN-U.pdf
D2 D2_1: "LED RED DIFFUSED 0805 SMD", Digikey Part Number=475-1278-1-ND, Forward Voltage Drop=2V, Manufacturer=OSRAM, MPN="LS R976-NR-1", Package="0805 (2012 Metric)"
D3 D3_1: "LED YELLOW DIFFUSED 0805 SMD", Digikey Part Number=475-2560-1-ND, Forward Voltage Drop=2.2V, Manufacturer=OSRAM, MPN="LY R976-PS-36", Package="0805 (2012 Metric)"
D4 D4_1 D5 D5_1 D6 D6_1: "LED GREEN DIFFUSED 0805 SMD", Digikey Part Number=475-1410-1-ND, Forward Voltage Drop=2.2V, Manufacturer=OSRAM, MPN="LG R971-KN-1", Package="0805 (2012 Metric)"
E-C E-E: library part CON_5M_PH_TOP_SMT, "CONN HEADER PH TOP 5POS 2MM SMD", Manufacturer=JST, Part Number=B5B-PH-SM4-TB, ComponentLink1Description=Datasheet, ComponentLink1URL=http://www.jst-mfg.com/product/pdf/eng/ePH.pdf
F5A: library part FUSE-5A, "FUSE HOLDER RADIAL 250V 6.3A PCB"
JMP JMP_1: "Header, 2-Pin", LatestRevisionDate=17-Jul-2002, LatestRevisionNote="Re-released for DXP Platform.", Publisher="Altium Limited"
LS-C LS-E-B LS-ET: library part CON_2M_PH_TOP_SMT, "CONN HEADER PH TOP 2POS 2MM SMD", Manufacturer=JST, Part Number=B2B-PH-SM4-TB, ComponentLink1Description=Datasheet, ComponentLink1URL=http://www.jst-mfg.com/product/pdf/eng/ePH.pdf
MH1 MH1_1 MH2 MH2_1 MH3 MH3_1 MH4 MH4_1: "6cm x 6cm"
P1 P1_1: "Header, 4-Pin Dual row", Digikey Part Number=S9015E-04-ND, Manufacturer="Sullins Connector Solutions", MPN=GRPB042VWVN-RC
POWER: library part CON_2M_PH_TOP_TH, "CONN HEADER PH TOP 2POS 2MM", Manufacturer=JST, Part Number=B2B-PH-K-S, ComponentLink1Description=Datasheet, ComponentLink1URL=http://www.jst-mfg.com/product/pdf/eng/ePH.pdf
R0 R1 R1_1 R8 R24 R25: "RES SMD 0 OHM JUMPER 1/10W 0603", Digikey Part Number=311-0.0GRCT-ND, Manufacturer=Yageo, MPN=RC0603JR-070RL, Package="0603 (1608 Metric)", Dimensions="0.063\" L x 0.031\" W (1.60mm x 0.80mm)"
R2 R2_1: "RES SMD 120 OHM 5% 1/10W 0603", Digikey Part Number=311-120GRCT-ND, Manufacturer=Yageo, MPN=RC0603JR-07120RL, Package="0603 (1608 Metric)", Tolerance=5%, Dimensions="0.063\" L x 0.031\" W (1.60mm x 0.80mm)"
R3: "RES SMD 4.7K OHM 5% 1/10W 0603", Digikey Part Number=311-4.7KGRCT-ND, Manufacturer=Yageo, MPN=RC0603JR-074K7L, Package="0603 (1608 Metric)", Tolerance=5%, Dimensions="0.063\" L x 0.031\" W (1.60mm x 0.80mm)"
R3_1 R9 R10_1 R11_1 R12_1 R13_1 R18 R19 R21 R23: "RES SMD 100 OHM 1% 1/10W 0603", Digikey Part Number=311-100HRCT-ND, Manufacturer=Yageo, MPN=RC0603FR-07100RL, Package="0603 (1608 Metric)", Tolerance=1%, Dimensions="0.063\" L x 0.031\" W (1.60mm x 0.80mm)"
R4 R4_1 R5 R5_1 R6 R6_1 R7 R7_1 R8_1 R9_1 R10 R11 R12 R13 R14 R15 R16 R17 R20 R22: "RES SMD 10K OHM 5% 1/10W 0603", Digikey Part Number=311-10KGRCT-ND, Manufacturer=Yageo, MPN=RC0603JR-0710KL, Package="0603 (1608 Metric)", Tolerance=5%, Dimensions="0.063\" L x 0.031\" W (1.60mm x 0.80mm)"
S1 S1_1: "Power Switch (Red)", Digikey Part Number=CKN10587CT-ND, Manufacturer=C&K, MPN="PTS830GM140 SMTR LFS", ComponentLink1Description=Datasheet, ComponentLink1URL=https://www.ckswitches.com/media/1478/pts830.pdf
S2 S2_1 S3 S3_1: "Tactile Switch (Grey)", Digikey Part Number=SW1021TR-ND, Manufacturer="Omron Electronics Inc-EMC Div", MPN=B3U-1100P
U1 U1_1: library part LTC2875, "IC TXRX CAN 4MBPS 8SO", Digikey Part Number=LTC2875IS8#PBF-ND, Manufacturer="Linear Technologies", MPN=LTC2875IS8#PBF, Package="8-SOIC (0.154\", 3.90mm Width)", ComponentLink1Description=Datasheet, ComponentLink1URL=https://www.analog.com/media/en/technical-documentation/data-sheets/2875f.pdf
U2 U2_1: Digikey Part Number=497-15167-ND, Manufacturer=STMicroelectronics, Package=64-LQFP, ComponentLink1Description=Datasheet, ComponentLink1URL=https://www.st.com/content/ccc/resource/technical/document/datasheet/95/3c/2e/5b/21/09/45/a6/DM00115237.pdf/files/DM00115237.pdf/jcr:content/translations/en.DM00115237.pdf#%5B%7B%22num%22%3A96%2C%22gen%22%3A0%7D%2C%7B%22name%22%3A%22XYZ%22%7D%2C67%2C755%2Cnull%5D, MPN=STM32F091RC
ULTRA1 ULTRA2: library part CON_4M_PH_TOP_SMT, "CONN HEADER PH TOP 4POS 2MM SMD", Manufacturer=JST, Part Number=B4B-PH-SM4-TB, ComponentLink1Description=Datasheet, ComponentLink1URL=http://www.jst-mfg.com/product/pdf/eng/ePH.pdf
VR1 VR1_1: "IC REG LINEAR 3.3V 1A DPAK", Current Output=1A, Digikey Part Number=NCP1117DT33T5GOSCT-ND, Manufacturer="ON Semiconductor", MPN=NCP1117DT33T5G
Y1 Y1_1: "CRYSTAL 32MHZ 8PF SMD", Digikey Part Number=1253-1730-1-ND, Manufacturer="Kyocera International Inc. Electronic Components", MPN=CX2520DB32000D0GPSC1, Package="4-SMD, No Lead", Dimensions="0.098\" L x 0.079\" W (2.50mm x 2.00mm)"

## Via types
v1: diameter 28, hole 16, Top Layer to Bottom Layer, 54 vias
v2: diameter 50, hole 28, Top Layer to Bottom Layer, 40 vias

## Nets (pads, with @x,y where several pads share a name; then routed paths per layer and width w, separated by ;. In a path a pad name is that pad's centre, name@x,y a point inside that pad or via, vN(x,y) a via of type N, cw(c..) or ccw(c..) an arc to the next point about the centre after c; other vN are vias at no path point)
pads on no net: 3V3.1 3V3_1.1 5V.1 C1.1 C1.2 C1_1.1 C1_1.2 C2.1 C2.2 C2_1.1 C2_1.2 C3.1 C3.2 C3_1.1 C3_1.2 C4.1 C4.2 C4_1.1 C4_1.2 C5.1 C5.2 C5_1.1 C5_1.2 C6.1 C6.2 C6_1.1 C6_1.2 C7.1 C7.2 C7_1.1 C7_1.2 C8.1 C8.2 C8_1.1 C8_1.2 C9.1 C9.2 C9_1.1 C9_1.2 C10.1 C10.2 C10_1.1 C10_1.2 C11.1 C11.2 C11_1.1 C11_1.2 C12.1 C12.2 C12_1.1 C12_1.2 C13.1 C13.2 C13_1.1 C13_1.2 C14.1 C14.2 C14_1.1 C14_1.2 CAN1.1 CAN1.2 CAN1.3 CAN1.4 CAN1.5 CAN1_1.1 CAN1_1.2 CAN1_1.3 CAN1_1.4 CAN1_1.5 CAN2.1 CAN2.2 CAN2.3 CAN2.4 CAN2.5 CAN2_1.1 CAN2_1.2 CAN2_1.3 CAN2_1.4 CAN2_1.5 CANH1.1 CANH1_1.1 CANL1.1 CANL1_1.1 D1.1 D1.2 D1.3 D1_1.1 D1_1.2 D1_1.3 D2.1 D2.2 D2_1.1 D2_1.2 D3.1 D3.2 D3_1.1 D3_1.2 D4.1 D4.2 D4_1.1 D4_1.2 D5.1 D5.2 D5_1.1 D5_1.2 D6.1 D6.2 D6_1.1 D6_1.2 E-C.1 E-C.2 E-C.3 E-C.4 E-C.5 E-C.6 E-C.7 E-E.1 E-E.2 E-E.3 E-E.4 E-E.5 E-E.6 E-E.7 EC1.1 EC2.1 ECI.1 EE1.1 EE2.1 EEI.1 ENC1.1 ENC1.2 ENC1.3 ENC1.4 ENC1.5 ENC.1 F5A.1 F5A.2 GND.1 GND_1.1 JMP.1 JMP.2 JMP_1.1 JMP_1.2 LED1.1 LED1.2 LED1.3 LED1.4 LED1.5 LED2.1 LED2.2 LED2.3 LED2.4 LED2.5 LS1.1 LS1.2 LS1.3 LS1.4 LS2.1 LS2.2 LS2.3 LS2.4 LS-C.1 LS-C.2 LS-C.3 LS-C.4 LS-E-B.1 LS-E-B.2 LS-E-B.3 LS-E-B.4 LS-ET.1 LS-ET.2 LS-ET.3 LS-ET.4 M-A.1 M-A.2 M-A.3 M-A.4 M-A.5 M-C.1 M-C.2 M-C.3 M-C.4 M-C.5 M-E.1 M-E.2 M-E.3 M-E.4 M-E.5 M-F.1 M-F.2 M-F.3 M-F.4 M-F.5 M-P.1 M-P.2 M-P.3 M-P.4 M-P.5 MH1.0 MH1_1.0 MH2.0 MH2_1.0 MH3.0 MH3_1.0 MH4.0 MH4_1.0 MOIST-D.1 MOIST-P.1 MOIST.1 MOIST.2 MOIST.3 MOIST.4 MOIST.5 P1.1 P1.2 P1.3 P1.4 P1.5 P1.6 P1.7 P1.8 P1_1.1 P1_1.2 P1_1.3 P1_1.4 P1_1.5 P1_1.6 P1_1.7 P1_1.8 POWER.1 POWER.2 POWER_1.1 POWER_1.2 PWMA.1 PWMC.1 PWME.1 PWMF.1 PWMP.1 R0.1 R0.2 R1.1 R1.2 R1_1.1 R1_1.2 R2.1 R2.2 R2_1.1 R2_1.2 R3.1 R3.2 R3_1.1 R3_1.2 R4.1 R4.2 R4_1.1 R4_1.2 R5.1 R5.2 R5_1.1 R5_1.2 R6.1 R6.2 R6_1.1 R6_1.2 R7.1 R7.2 R7_1.1 R7_1.2 R8.1 R8.2 R8_1.1 R8_1.2 R9.1 R9.2 R9_1.1 R9_1.2 R10.1 R10.2 R10_1.1 R10_1.2 R11.1 R11.2 R11_1.1 R11_1.2 R12.1 R12.2 R12_1.1 R12_1.2 R13.1 R13.2 R13_1.1 R13_1.2 R14.1 R14.2 R15.1 R15.2 R16.1 R16.2 R17.1 R17.2 R18.1 R18.2 R19.1 R19.2 R20.1 R20.2 R21.1 R21.2 R22.1 R22.2 R23.1 R23.2 R24.1 R24.2 R25.1 R25.2 S1.1 S1.2 S1.3 S1.4 S1_1.1 S1_1.2 S1_1.3 S1_1.4 S2.1 S2.2 S2_1.1 S2_1.2 S3.1 S3.2 S3_1.1 S3_1.2 SV1.1 SV1.2 SV1.3 SV1.4 SV1.5 SV2.1 SV2.2 SV2.3 SV2.4 TEMP.1 TEMP.2 TEMP.3 TEMP.4 TEMP.5 TEMPT.1 TP_5V.1 U1.1 U1.2 U1.3 U1.4 U1.5 U1.6 U1.7 U1.8 U1_1.1 U1_1.2 U1_1.3 U1_1.4 U1_1.5 U1_1.6 U1_1.7 U1_1.8 U2.1 U2.2 U2.3 U2.4 U2.5 U2.6 U2.7 U2.8 U2.9 U2.10 U2.11 U2.12 U2.13 U2.14 U2.15 U2.16 U2.17 U2.18 U2.19 U2.20 U2.21 U2.22 U2.23 U2.24 U2.25 U2.26 U2.27 U2.28 U2.29 U2.30 U2.31 U2.32 U2.33 U2.34 U2.35 U2.36 U2.37 U2.38 U2.39 U2.40 U2.41 U2.42 U2.43 U2.44 U2.45 U2.46 U2.47 U2.48 U2.49 U2.50 U2.51 U2.52 U2.53 U2.54 U2.55 U2.56 U2.57 U2.58 U2.59 U2.60 U2.61 U2.62 U2.63 U2.64 U2_1.1 U2_1.2 U2_1.3 U2_1.4 U2_1.5 U2_1.6 U2_1.7 U2_1.8 U2_1.9 U2_1.10 U2_1.11 U2_1.12 U2_1.13 U2_1.14 U2_1.15 U2_1.16 U2_1.17 U2_1.18 U2_1.19 U2_1.20 U2_1.21 U2_1.22 U2_1.23 U2_1.24 U2_1.25 U2_1.26 U2_1.27 U2_1.28 U2_1.29 U2_1.30 U2_1.31 U2_1.32 U2_1.33 U2_1.34 U2_1.35 U2_1.36 U2_1.37 U2_1.38 U2_1.39 U2_1.40 U2_1.41 U2_1.42 U2_1.43 U2_1.44 U2_1.45 U2_1.46 U2_1.47 U2_1.48 U2_1.49 U2_1.50 U2_1.51 U2_1.52 U2_1.53 U2_1.54 U2_1.55 U2_1.56 U2_1.57 U2_1.58 U2_1.59 U2_1.60 U2_1.61 U2_1.62 U2_1.63 U2_1.64 UART_RTS.1 UART_RX.1 UART_TX.1 UE1.1 UE2.1 ULTRA1.1 ULTRA1.2 ULTRA1.3 ULTRA1.4 ULTRA1.5 ULTRA1.6 ULTRA2.1 ULTRA2.2 ULTRA2.3 ULTRA2.4 ULTRA2.5 ULTRA2.6 UT1.1 UT2.1 VR1.1 VR1.2 VR1.3 VR1_1.1 VR1_1.2 VR1_1.3 Y1.1 Y1.2 Y1.3 Y1.4 Y1_1.1 Y1_1.2 Y1_1.3 Y1_1.4